# EAGLE board Arduino (EAGLE 7.2.0)
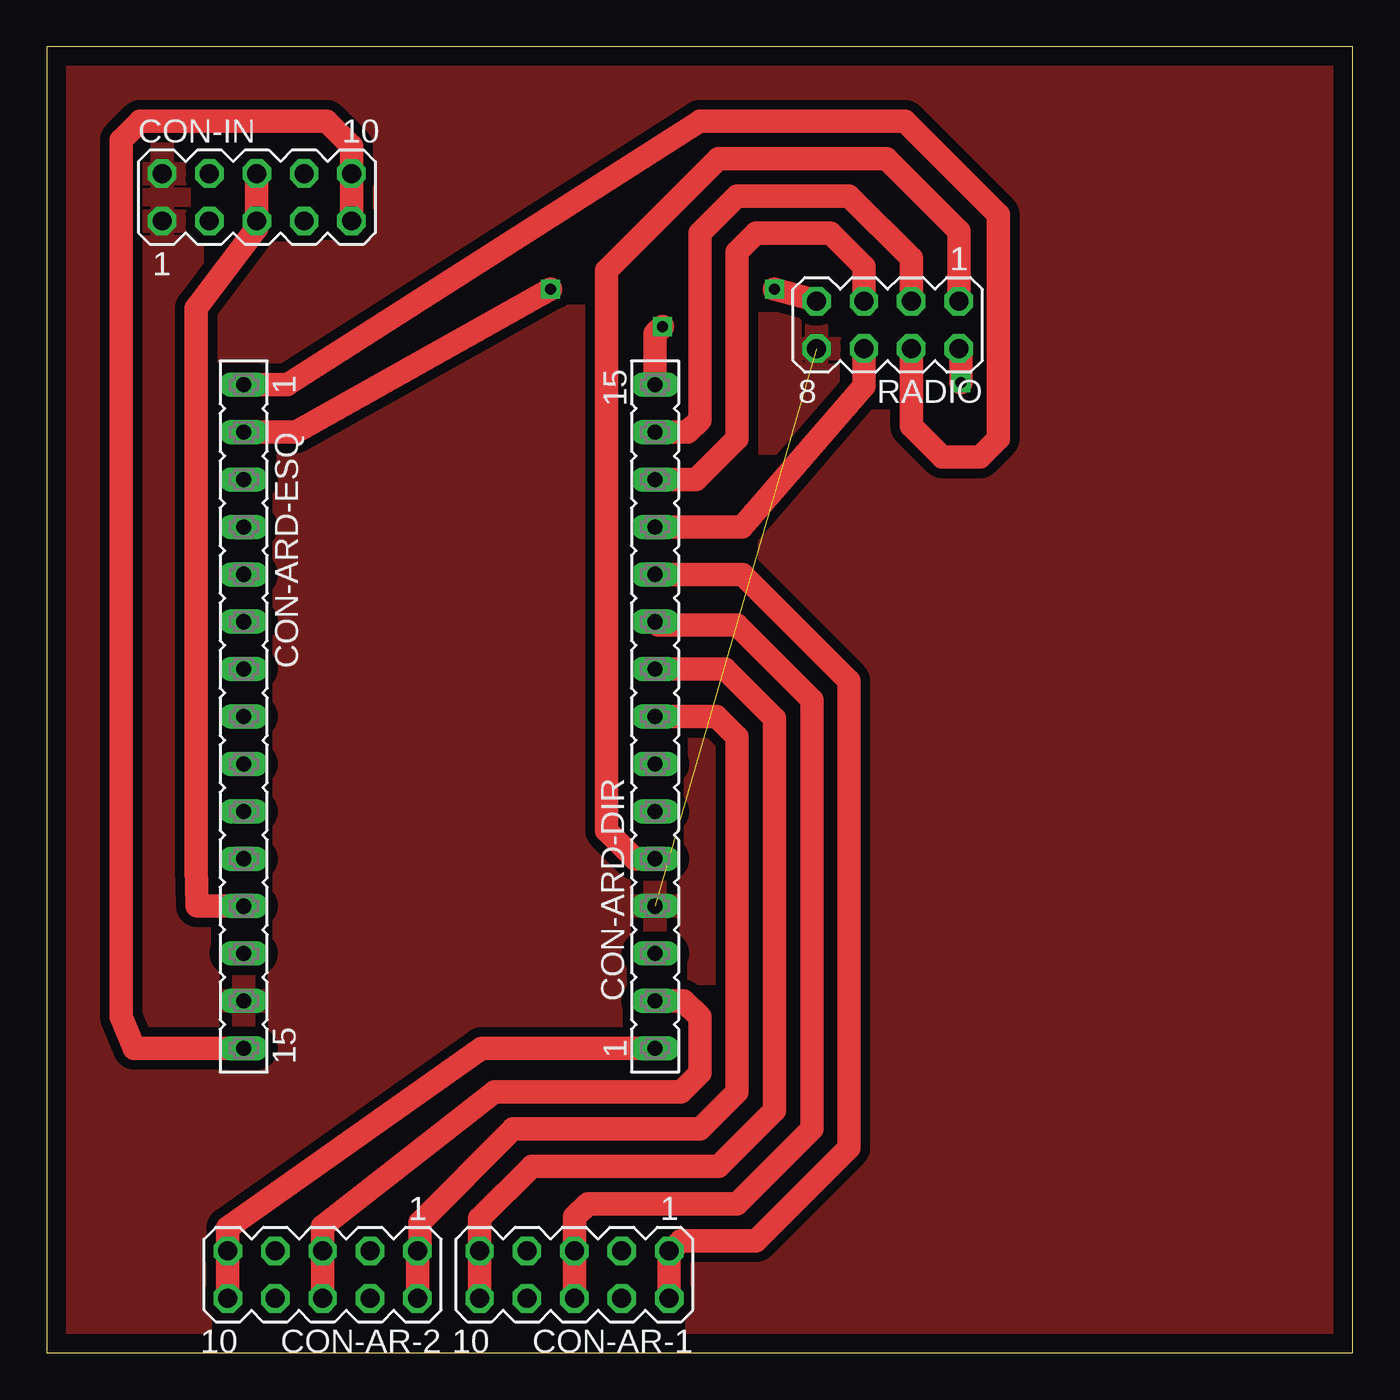
[diagram p0: board, top side]
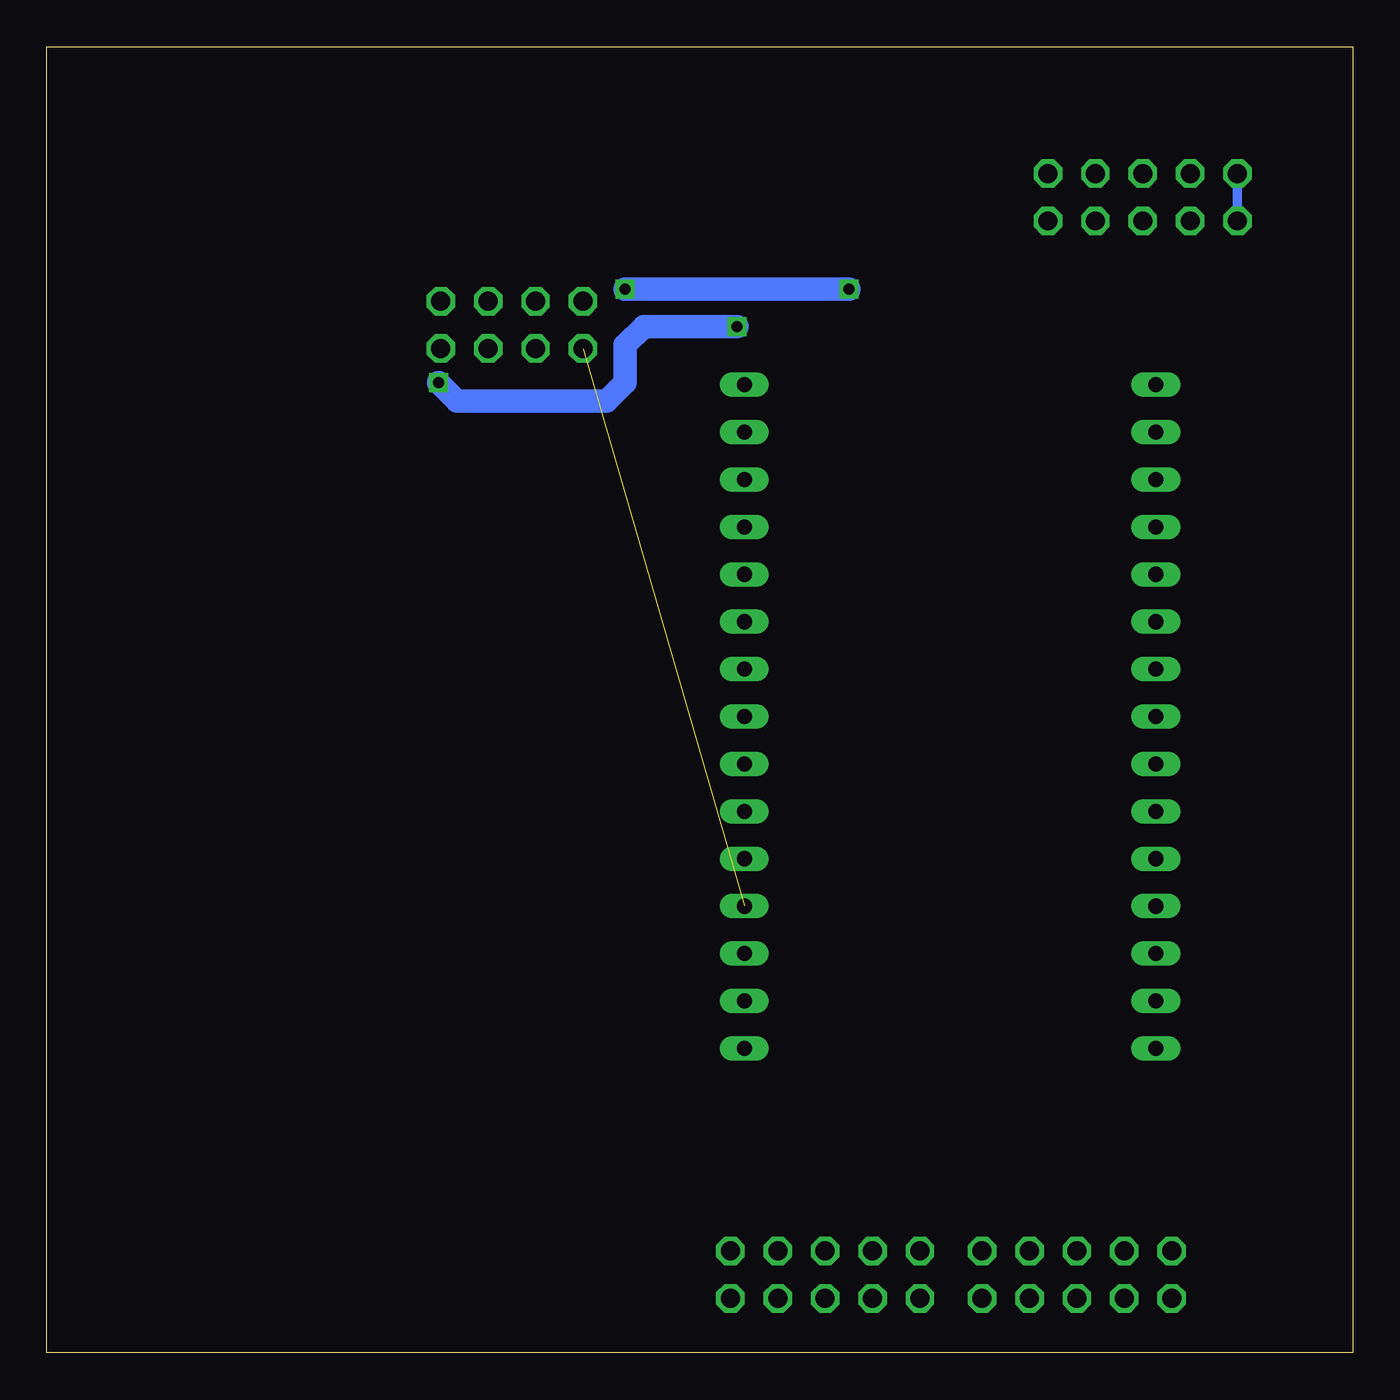
[diagram p1: board, bottom side, seen from below]

Size 70 x 70 mm. Coordinates in mm from the lower left corner, seen from the top.
Outline: 0,0 70,0 70,70 0,70 0,0
Copper layers (1*16): Top 0.035mm / dielectric 1.5mm / Bottom 0.035mm
Design rules "default *": minimum track width 10mil, minimum drill 24mil, track to track 20mil, track to pad 20mil, pad to pad 20mil, via to via 20mil, smd to smd 20mil, copper to edge 40mil, drill to drill 8mil, minimum pad ring 10mil, minimum via ring 8mil, stop-mask expansion 4mil, vias tented up to drill 0mil, thermal gap 10mil
Net classes: 0 default: width 0.762 mm

## Footprints (pad centres in the part's own frame; a part is rotated, then mirrored left to right if it is on the bottom)
MA05-2 = drill 1.016 octagon: 1 -5.08,-1.27; 2 -5.08,1.27; 3 -2.54,-1.27; 4 -2.54,1.27; 5 0,-1.27; 6 0,1.27; 7 2.54,-1.27; 8 2.54,1.27; 9 5.08,-1.27; 10 5.08,1.27
FE15 = drill 0.813 long: 1 -17.78,0; 2 -15.24,0; 3 -12.7,0; 4 -10.16,0; 5 -7.62,0; 6 -5.08,0; 7 -2.54,0; 8 0,0; 9 2.54,0; 10 5.08,0; 11 7.62,0; 12 10.16,0; 13 12.7,0; 14 15.24,0; 15 17.78,0
MA04-2 = drill 1.016 octagon: 1 -3.81,-1.27; 2 -3.81,1.27; 3 -1.27,-1.27; 4 -1.27,1.27; 5 1.27,-1.27; 6 1.27,1.27; 7 3.81,-1.27; 8 3.81,1.27

## Placement (x,y rotation side)
CON-AR-1  [MA05-2]  28.28,4.19 180 top
CON-AR-2  [MA05-2]  14.79,4.19 180 top
CON-ARD-DIR  [FE15]  32.61,34.1 90 top
CON-ARD-ESQ  [FE15]  10.56,34.1 270 top
CON-IN  [MA05-2]  11.26,61.93 0 top
RADIO  [MA04-2]  45.07,55.09 180 top

## Library data of the parts
CON-AR-1 CON-AR-2 CON-IN RADIO = con-lstb; OC_FARNELL: unknown; OC_NEWARK: unknown
CON-ARD-DIR CON-ARD-ESQ = con-lsta; OC_FARNELL: unknown; OC_NEWARK: unknown

## Nets
3V3: CON-ARD-ESQ.2 RADIO.7
5V: CON-ARD-ESQ.12 CON-IN.5 CON-IN.6
A0: CON-ARD-ESQ.4
A1: CON-ARD-ESQ.5
A2: CON-ARD-ESQ.6
A3: CON-ARD-ESQ.7
A4: CON-ARD-ESQ.8
A5: CON-ARD-ESQ.9
A6: CON-ARD-ESQ.10
A7: CON-ARD-ESQ.11
D2: CON-ARD-DIR.5 RADIO.1
D3: CON-ARD-DIR.6
D4: CON-ARD-DIR.7
D5: CON-AR-2.1 CON-AR-2.2 CON-ARD-DIR.8
D6: CON-AR-1.9 CON-AR-1.10 CON-ARD-DIR.9
D7: CON-AR-1.5 CON-AR-1.6 CON-ARD-DIR.10
D8: CON-AR-1.1 CON-AR-1.2 CON-ARD-DIR.11
D9: CON-ARD-DIR.12 RADIO.6
D10: CON-ARD-DIR.13 RADIO.5
D11: CON-ARD-DIR.14 RADIO.3
D12: CON-ARD-DIR.15 RADIO.2
D13: CON-ARD-ESQ.1 RADIO.4
GND: CON-ARD-DIR.4 CON-ARD-ESQ.14 CON-IN.1 CON-IN.2 RADIO.8
REF: CON-ARD-ESQ.3
RST: CON-ARD-ESQ.13
RST-2: CON-ARD-DIR.3
RX0: CON-AR-2.5 CON-AR-2.6 CON-ARD-DIR.2
TX1: CON-AR-2.9 CON-AR-2.10 CON-ARD-DIR.1
VO: CON-ARD-ESQ.15 CON-IN.9 CON-IN.10

## Tracks (layer width: path | path; a pad name or v marks a point on that pad's centre or on a via)
3V3  (via drill 0.6)
  Top 1.27: RADIO.7 41.36,56.36 v39,57 | v27,57 13.34,49.34 CON-ARD-ESQ.2
  Bottom 1.27: v39,57 v27,57
5V
  Top 1.27: CON-IN.6 CON-IN.5 11.26,60.26 8,56 8,26 8.06,23.94 CON-ARD-ESQ.12
D2
  Top 1.27: CON-ARD-DIR.5 31.52,26.48 30,28 30,58 36,64 45,64 48.88,60.12 RADIO.1
D5
  Top 1.27: CON-ARD-DIR.8 35.9,34.1 37,33 37,14 35,12 25,12 20,7 20,5.59 CON-AR-2.1 CON-AR-2.2
D6
  Top 1.27: CON-AR-1.10 CON-AR-1.9 23.2,7.2 26,10 36,10 39,13 39,34 36.36,36.64 CON-ARD-DIR.9
D7
  Top 1.27: CON-AR-1.6 CON-AR-1.5 28.28,7.28 29,8 37,8 41,12 41,35 37,39 32.79,39 CON-ARD-DIR.10
D8
  Top 1.27: CON-AR-1.2 CON-AR-1.1 33.36,5.36 34,6 38,6 43,11 43,36 37.28,41.72 CON-ARD-DIR.11
D9
  Top 1.27: CON-ARD-DIR.12 37.26,44.26 43.8,51.8 RADIO.6
D10
  Top 0.762: 33.66,46.99 33.02,46.99 CON-ARD-DIR.13
  Top 1.27: RADIO.5 43.8,58.2 42,60 38,60 37,59 37,49 34.8,46.8 CON-ARD-DIR.13
D11
  Top 1.27: RADIO.3 46.34,58.66 43,62 37,62 35,60 35,50 34.34,49.34 CON-ARD-DIR.14
D12  (via drill 0.6)
  Top 1.27: RADIO.2 49,53.7 v49,52 | v33,55 32.61,54.61 CON-ARD-DIR.15
  Bottom 1.27: v49,52 48,51 40,51 39,52 39,54 38,55 v33,55
D13
  Top 1.27: CON-ARD-ESQ.1 12.88,51.88 35,66 46,66 51,61 51,49 50,48 48,48 46.34,49.66 RADIO.4
GND  (1 unrouted)
  Bottom 0.5: CON-IN.2 CON-IN.1
  pour Top: 0,0 0,69 70,69 70,0
RX0
  Top 1.27: CON-AR-2.6 CON-AR-2.5 14.79,6.79 24,14 34,14 35,15 35,18 34.14,18.86 CON-ARD-DIR.2
TX1
  Top 1.27: CON-AR-2.10 CON-AR-2.9 9.71,6.71 23.32,16.32 CON-ARD-DIR.1
VO
  Top 1.27: CON-IN.9 CON-IN.10 16.34,64.66 15,66 5,66 4,65 4,18 4.68,16.32 CON-ARD-ESQ.15